# Altium PCB Lite Carrier for Mu.PcbDoc (part 10 of 15)
Units mm, origin at the board's own origin, x right, y up, seen from the top; angles counter-clockwise.
Board outline 146 x 102 mm, 20 copper layers (F.Cu, F.Mask, B.Cu, B.Mask, In1.Cu, F.SilkS, In2.Cu, B.SilkS, F.Adhes, B.Adhes, F.Paste, B.Paste, Dwgs.User, Cmts.User, Eco1.User, Eco2.User, Edge.Cuts, Margin, B.CrtYd, F.CrtYd); 254 components, 382 nets, 1258 pads, 1020 vias.
Unrouted connection lines stored in the file: 113.
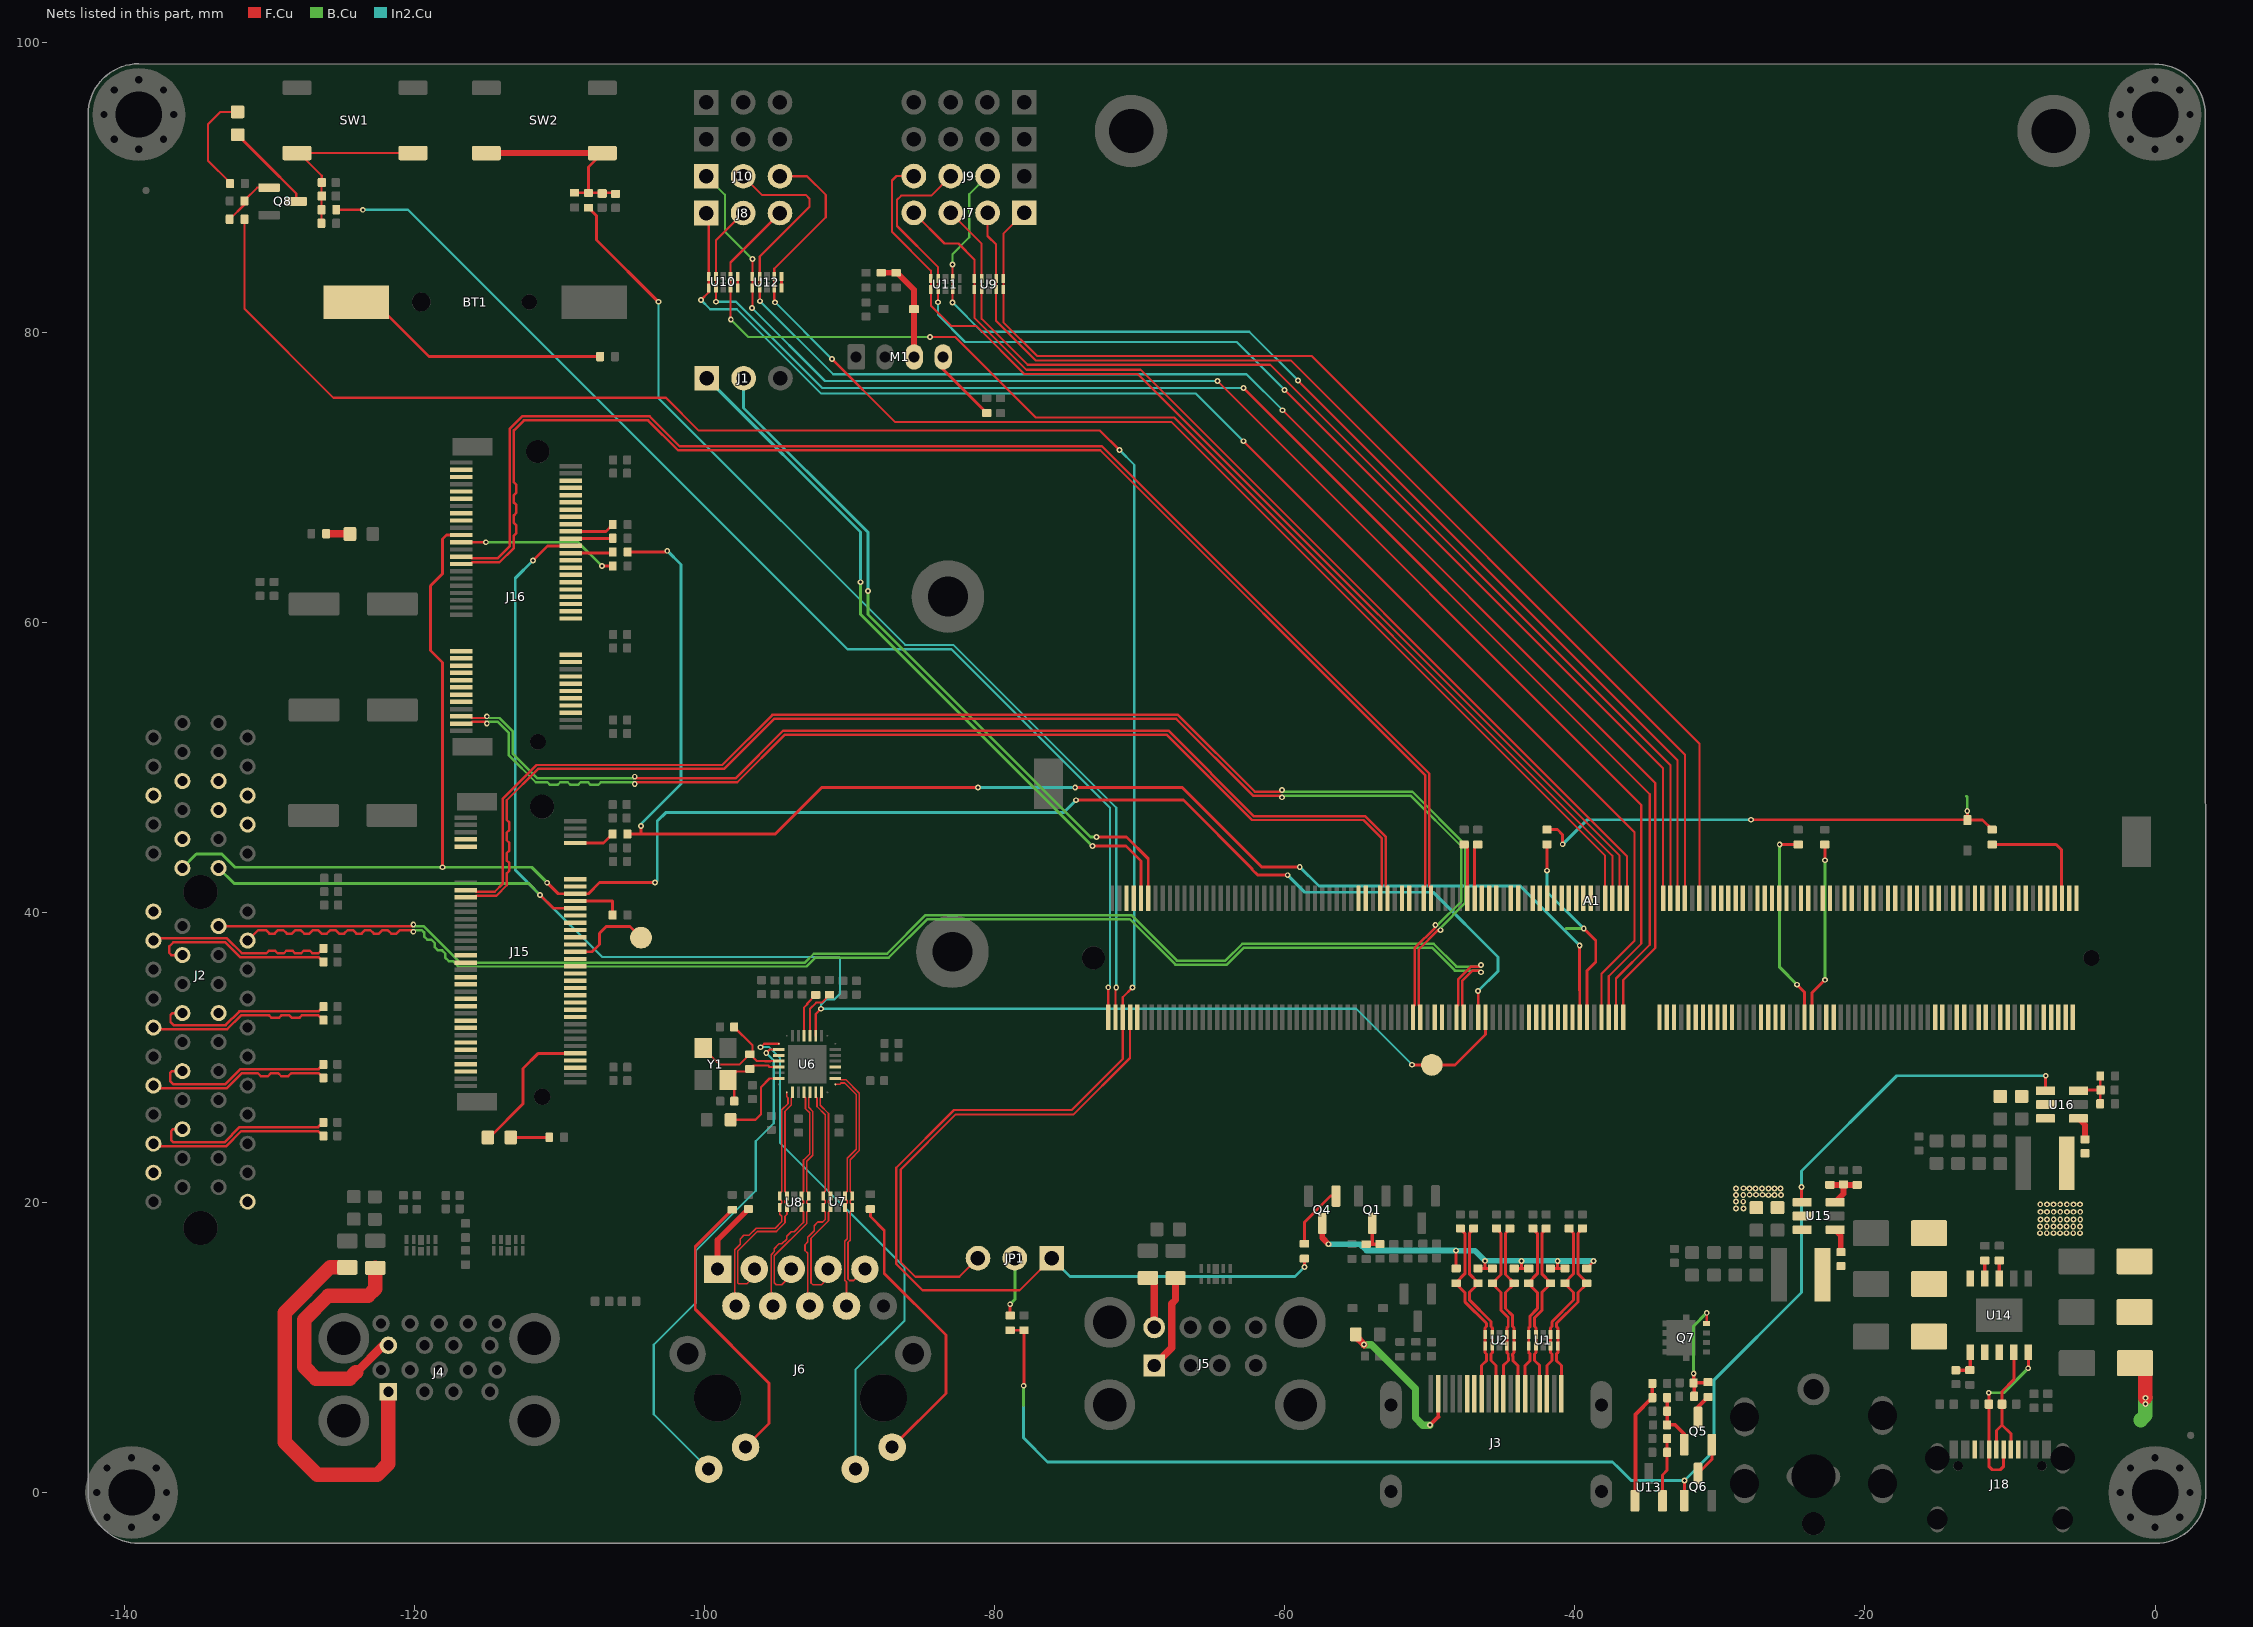
[diagram p20: the nets of this part, all layers, seen from the top]

## Via types
v1: diameter 0.4, hole 0.2, F.Cu to B.Cu, tented both sides, 952 vias
v2: diameter 0.5, hole 0.3, F.Cu to B.Cu, tented both sides, 68 vias

## Nets (pads, with @x,y where several pads share a name; then routed paths per layer and width w, separated by ;. In a path a pad name is that pad's centre, name@x,y a point inside that pad or via, vN(x,y) a via of type N, cw(c..) or ccw(c..) an arc to the next point about the centre after c; other vN are vias at no path point) (continued)
I2C2_SDA: A1.156 J7.1 U9.1 U9.10 | length 78.8
  F.Cu w0.15: J7.1@-77.95,88.22 -79.4,86.77 U9.10@-79.4,82.933 -79.4,80.684 -77.076,78.36 -58.16,78.36 -31.415,51.615 A1.156@-31.415,40.96
I2C3_SCL: A1.150 J9.2 U11.2 U11.9 | length 82.3
  F.Cu w0.15: v1(-82.9,82.04) U11.9@-82.9,82.933 U11.2@-82.9,83.708 v1(-82.9,84.67) ; v1(-59.08,76.66) -59.08,76.63 -32.915,50.465 A1.150@-32.915,40.96
  B.Cu w0.15: v1(-82.9,84.67) -82.9,85.38 -81.75,86.53 -81.75,89.5 J9.2@-80.49,90.76
  In2.Cu w0.15: v1(-82.9,82.04) -80.89,80.03 -62.45,80.03 v1(-59.08,76.66)
I2C3_SDA: A1.152 J7.2 U9.2 U9.9 | length 77.5
  F.Cu w0.15: J7.2@-80.49,88.22 -80.49,86.63 -79.9,86.04 U9.9@-79.9,82.933 -79.9,80.76 -77.19,78.05 -59.58,78.05 -32.415,50.885 A1.152@-32.415,40.96
I2C4_SCL: A1.146 J9.3 U11.4 U11.7 | length 85.4
  F.Cu w0.15: v1(-83.9,82.06) U11.7@-83.9,82.933 -83.9,84.48 -86.73,87.31 -86.73,89.12 -86.44,89.41 -84.38,89.41 J9.3@-83.03,90.76 ; v1(-60.01,76.01) -33.915,49.915 A1.146@-33.915,40.96
  In2.Cu w0.15: v1(-83.9,82.06) -83.9,81.18 -82.04,79.32 -63.32,79.32 v1(-60.01,76.01)
I2C4_SDA: A1.148 J7.3 U9.4 U9.7 | length 77.6
  F.Cu w0.15: J7.3@-83.03,88.22 -80.9,86.09 U9.7@-80.9,82.933 -80.9,80.92 -77.73,77.75 -61.01,77.75 -33.415,50.155 A1.148@-33.415,40.96
I2C5_SCL: A1.142 J9.4 U11.5 U11.6 | length 77.5
  F.Cu w0.15: J9.4@-85.57,90.76 -86.772,90.76 -87.08,90.452 -87.08,87.23 -87.08,86.92 -84.4,84.24 U11.5@-84.4,83.708 U11.6@-84.4,82.933 -84.4,81.83 -83,80.43 -81.27,80.43 -77.95,77.11 -70.135,77.11 -36.915,43.89 A1.142@-36.915,40.96
I2C5_SDA: A1.144 J7.4 U9.5 U9.6 | length 72.8
  F.Cu w0.15: J7.4@-85.57,88.22 -83.46,86.11 -82.5,86.11 -81.4,85.01 U9.6@-81.4,82.933 -81.4,80.996 -77.814,77.41 -69.94,77.41 -36.415,43.885 A1.144@-36.415,40.96
LED0_100: U6.27
LED1_1000: J6.L4 U6.26 | length 34.9
  F.Cu w0.15: v1(-95.75,30.3) -95.51,30.54 U6.26@-94.885,30.54
  In2.Cu w0.15: J6.L4@-99.715,1.61 -103.5,5.395 -103.5,10.19 -100.61,13.08 -100.61,16.67 -96.47,20.81 -96.47,24.218 -95.23,25.458 -95.23,29.78 v1(-95.75,30.3)
LED2_ACT: J6.L2 U6.25 | length 36.3
  F.Cu w0.15: v1(-96.134,30.694) -95.888,30.94 U6.25@-94.885,30.94
  In2.Cu w0.15: v1(-96.134,30.694) -96.103,30.725 -95.574,30.725 -94.79,29.941 -94.79,24.09 -86.22,15.52 -86.22,11.84 -89.605,8.455 J6.L2@-89.605,1.61
MDI0+: J6.R2 U6.1 U8.5 U8.6 | length 17.5
  F.Cu w0.116: J6.R2@-97.835,12.86 -97.928,12.953 -97.928,16.736 -97.537,17.127 -97.537,17.477 -97.289,17.726 -96.938,17.726 -96.445,18.219 -96.196,18.219 -95.135,18.219 -94.674,18.68 -94.674,19.044 -94.815,19.185 U8.6@-94.815,19.653 -94.815,19.841 -94.674,19.982 -94.674,20.1 -94.815,20.241 U8.5@-94.815,20.428 -94.815,20.616 -94.674,20.757 -94.674,26.38 -94.244,26.81 -94.244,27.199 -94.335,27.29 U6.1@-94.335,27.59
MDI0-: J6.R3 U6.2 U8.4 U8.7 | length 17.6
  F.Cu w0.116: J6.R3@-96.565,15.4 -96.565,14.905 -97.08,14.39 -97.65,14.39 -97.71,14.45 -97.71,16.646 -96.355,18.001 -95.045,18.001 -94.456,18.59 -94.456,19.044 -94.315,19.185 U8.7@-94.315,19.653 -94.315,19.841 -94.456,19.982 -94.456,20.1 -94.315,20.241 U8.4@-94.315,20.428 -94.315,20.616 -94.456,20.757 -94.456,26.29 -94.026,26.72 -94.026,27.199 -93.935,27.29 U6.2@-93.935,27.59
MDI1+: J6.R4 U6.4 U8.2 U8.9 | length 16.5
  F.Cu w0.116: J6.R4@-95.295,12.86 -95.408,12.973 -95.408,16.402 -95.192,16.618 -95.192,16.813 -94.865,17.14 -94.67,17.14 -94.343,17.467 -94.343,17.662 -94.017,17.989 -93.821,17.989 -93.288,18.522 -93.174,18.636 -93.174,19.325 -93.315,19.466 U8.9@-93.315,19.653 -93.315,19.841 -93.174,19.982 -93.174,20.1 -93.315,20.241 U8.2@-93.315,20.428 -93.315,20.616 -93.174,20.757 -93.174,22.92 -92.759,23.335 -92.759,26.175 -93.044,26.46 -93.044,27.199 -93.135,27.29 U6.4@-93.135,27.59
MDI1-: J6.R5 U6.5 U8.1 U8.10 | length 16.5
  F.Cu w0.116: J6.R5@-94.025,15.4 -94.025,14.975 -94.67,14.33 -95.06,14.33 -95.19,14.46 -95.19,16.312 -92.956,18.546 -92.956,19.325 -92.815,19.466 U8.10@-92.815,19.653 -92.815,19.841 -92.956,19.982 -92.956,20.1 -92.815,20.241 U8.1@-92.815,20.428 -92.815,20.616 -92.956,20.757 -92.956,22.83 -92.541,23.245 -92.541,26.265 -92.826,26.55 -92.826,27.199 -92.735,27.29 U6.5@-92.735,27.59
MDI2+: J6.R6 U6.6 U7.5 U7.6 | length 16
  F.Cu w0.116: J6.R6@-92.755,12.86 -92.878,12.983 -92.878,15.838 -92.878,16.489 -93.075,16.686 -93.075,17.089 -92.878,17.286 -92.878,17.616 -92.817,17.677 -92.445,18.049 -92.445,18.403 -92.197,18.65 -91.844,18.65 -91.674,18.82 -91.674,19.33 -91.815,19.471 U7.6@-91.815,19.658 ; U6.6@-92.335,27.59 -92.335,27.29 -92.244,27.199 -92.244,26.61 -91.674,26.04 -91.674,20.762 -91.815,20.621 U7.5@-91.815,20.433 -91.815,20.246 -91.674,20.105 -91.674,19.987 U7.6@-91.815,19.846
MDI2-: J6.R7 U6.7 U7.4 U7.7 | length 16
  F.Cu w0.116: U6.7@-91.935,27.59 -91.935,27.29 -92.026,27.199 -92.026,26.7 -91.456,26.13 -91.456,20.762 -91.315,20.621 U7.4@-91.315,20.433 -91.315,20.246 -91.456,20.105 -91.456,19.987 U7.7@-91.315,19.846 ; J6.R7@-91.485,15.4 -91.485,14.775 -91.94,14.32 -92.53,14.32 -92.66,14.45 -92.66,17.526 -91.456,18.73 -91.456,19.33 -91.315,19.471 U7.7@-91.315,19.658
MDI3+: J6.R8 U6.9 U7.2 U7.9 | length 17.2
  F.Cu w0.116: U6.9@-90.985,28.14 -90.685,28.14 -90.594,28.231 -90.335,28.231 -89.549,27.445 -89.549,23.665 -90.174,23.04 -90.174,20.762 -90.315,20.621 U7.2@-90.315,20.433 -90.315,20.246 -90.174,20.105 -90.174,19.987 -90.315,19.846 U7.9@-90.315,19.658 -90.315,19.471 -90.174,19.33 -90.174,17.49 -90.33,17.334 -90.33,14.636 -90.215,14.521 J6.R8@-90.215,12.86 J6.R8@-90.33,12.975
MDI3-: J6.R9 U6.10 U7.1 U7.10 | length 18.3
  F.Cu w0.116: U6.10@-90.985,28.54 -90.685,28.54 -90.594,28.449 -90.245,28.449 -89.331,27.535 -89.331,23.575 -89.956,22.95 -89.956,20.762 -89.815,20.621 U7.1@-89.815,20.433 -89.815,20.246 -89.956,20.105 -89.956,19.987 -89.815,19.846 U7.10@-89.815,19.658 -89.815,19.471 -89.956,19.33 -89.956,17.4 -90.112,17.244 -90.112,14.726 -90.006,14.62 -89.725,14.62 J6.R9@-88.945,15.4 ; J6.R9@-88.962,15.4 J6.R9@-88.945,15.4 ; J6.R9@-88.945,14.735 J6.R9@-88.945,15.4 ; J6.R9@-88.94,14.71 -88.94,15.395 J6.R9@-88.945,15.4
Net-(A1-SIO_UART_RX): A1.12 J1.2 | length 48.9
  F.Cu w0.2: v1(-72.97,45.2) -70.92,45.2 -69.415,43.695 A1.12@-69.415,40.96
  B.Cu w0.2: v1(-88.737,62.148) -88.737,60.542 -73.395,45.2 v1(-72.97,45.2)
  In2.Cu w0.2: J1.2@-97.31,76.82 -97.31,74.775 -88.737,66.202 v1(-88.737,62.148)
Net-(A1-SIO_UART_TX): A1.10 J1.1 | length 49.6
  F.Cu w0.2: v1(-73.26,44.57) -70.95,44.57 -69.915,43.535 A1.10@-69.915,40.96
  B.Cu w0.2: v1(-89.25,62.76) -89.25,60.544 -73.276,44.57 v1(-73.26,44.57)
  In2.Cu w0.2: J1.1@-99.85,76.82 -89.25,66.22 v1(-89.25,62.76)
Net-(A1-TCP0_HPD): A1.187 R76.1 | length 12.3
  F.Cu w0.2: A1.187@-23.665,32.76 -23.665,34.428 v1(-22.748,35.345) ; R76.1@-22.775,44.671 -22.748,44.644 v1(-22.748,43.587)
  B.Cu w0.2: v1(-22.748,35.345) v1(-22.748,43.587)
Net-(A1-TCP1_HPD): A1.185 R77.1 | length 13.9
  F.Cu w0.2: v1(-25.883,44.672) -25.875,44.68 R77.1@-24.604,44.68 ; v1(-24.683,35.011) -24.165,34.493 A1.185@-24.165,32.76
  B.Cu w0.2: v1(-25.883,44.672) v1(-25.883,44.672) -25.882,36.21 v1(-24.683,35.011)
Net-(A1-{\B\I\O\S\_\S\E\L\}\)\: A1.133 R2.1 TP7.1 | length 14.9
  F.Cu w0.2: v1@-41.99,42.82 -41.97,42.82 v1(-41.92,42.87) R2.1@-41.92,44.68 ; v1(-39.39,38.88) -38.56,38.05 -38.56,36.58 -39.165,35.975 A1.133@-39.165,32.76
  B.Cu w0.2: TP7.1@-40.6,38.88 v1(-39.39,38.88)
  In2.Cu w0.2: v1(-41.92,42.87) -41.92,41.41 v1(-39.39,38.88)
Net-(A1-{\C\L\K\R\E\Q\3\}\)\: A1.100 R79.1 | length 3.8
  F.Cu w0.2: R79.1@-47.635,44.68 -47.415,44.46 A1.100@-47.415,40.96
Net-(A1-{\C\L\K\R\E\Q\4\}\)\: A1.102 R78.1 | length 3.8
  F.Cu w0.2: A1.102@-46.915,40.96 -46.915,44.46 R78.1@-46.695,44.68
Net-(BT1-+): BT1.1 R1.2 | length 18.4
  F.Cu w0.2: BT1.1@-124.01,82.07 -122.75,82.07 -118.99,78.31 R1.2@-107.2,78.31
Net-(D9-A): D9.2 R30.1 | length 2.7
  F.Cu w0.2: D9.2@-113.363,24.48 -110.72,24.48 R30.1@-110.71,24.49
Net-(D9-K): D9.1 J15.10 | length 9.8
  F.Cu w0.2: D9.1@-114.937,24.48 -114.83,24.48 -112.51,26.8 -112.51,29.23 -111.46,30.28 J15.10@-108.985,30.28
Net-(D21-A2): C66.1 D21.2 R48.1 R50.1 SW1.1 | length 13.7
  F.Cu w0.15: R50.1@-126.42,87.5 -126.42,90.278 C66.1@-126.387,90.31 -126.387,90.787 -127.94,92.34 SW1.1@-128.1,92.34 SW1.1@-120.1,92.34
Net-(D22-A): D22.2 R52.1 | length 7.1
  F.Cu w0.15: R52.1@-132.71,90.24 -132.71,90.3 -134.23,91.82 -134.23,94.33 -133.382,95.178 D22.2@-132.19,95.177
Net-(D22-K): D22.1 Q8.3 | length 6.3
  F.Cu w0.15: -129.282,90.695 -128.145,89.557 Q8.3@-128.145,89.01
  F.Cu w0.2: D22.1@-132.19,93.603 -129.282,90.695
Net-(D23-A): D23.2 R54.2 | length 1.7
  F.Cu w0.5: R54.2@-126.09,66.1 -124.468,66.1 D23.2@-124.447,66.08
Net-(D25-A2): C69.1 D25.2 R55.1 R56.1 SW2.1 | length 14
  F.Cu w0.2: R56.1@-108.96,89.61 -106.21,89.61 C69.1@-106.13,89.53 ; R55.1@-108,89.59 -108,91.39 SW2.1@-107.05,92.34
  F.Cu w0.4: SW2.1@-115.05,92.34 SW2.1@-107.05,92.34
Net-(D26-A): D26.2 M1.3 R68.1 R72.2 | length 7.4
  F.Cu w0.4: R68.1@-87.82,84.09 R72.2@-86.79,84.09 -86.73,84.09 -85.56,82.92 D26.2@-85.56,81.59 -85.56,78.3 M1.3@-85.55,78.29
Net-(J3-+5V): F1.2 J3.18 | length 11.3
  F.Cu w0.254: -49.43,5.205 J3.18@-49.43,6.805
  F.Cu w0.3: v1(-49.985,4.65) -49.43,5.205
  F.Cu w0.508: F1.2@-55.11,10.9 -55.11,10.775 v1(-54.535,10.2)
  B.Cu w0.508: v1(-54.535,10.2) -54.035,10.2 -50.985,7.15 -50.985,5.15 -50.485,4.65 v1(-49.985,4.65)
Net-(J4A-VBUS1): F4.2 J4.1 | length 27.9
  F.Cu w1: F4.2@-124.63,15.518 -125.822,15.518 -128.94,12.4 -128.94,3.46 -126.71,1.23 -122.55,1.23 -121.8,1.98 J4.1@-121.8,6.95
Net-(J4B-VBUS2): F5.2 J4.10 | length 17.6
  F.Cu w0.4: J4.10@-122.15,10.15 J4.10@-121.8,10.15
  F.Cu w0.6: -124.02,8.28 J4.10@-122.15,10.15
  F.Cu w1: -124.02,8.28 -124.05,8.28 -124.47,7.86 -126.8,7.86 -127.6,8.66 -127.6,11.91 -125.96,13.55 -123.2,13.55 -122.7,14.05 F5.2@-122.7,15.508
Net-(J5-VBUS1): F2.2 J5.1 | length 6.7
  F.Cu w0.5: J5.1@-69,8.762 -67.79,9.972 -67.79,13.02 -67.53,13.28 F2.2@-67.53,14.895
Net-(J5-VBUS2): F3.2 J5.5 | length 3.5
  F.Cu w0.5: J5.5@-69,11.382 F3.2@-69,14.895
Net-(J6-CT): C48.1 J6.R1 | length 5
  F.Cu w0.4: J6.R1@-99.105,15.4 -99.105,17.415 C48.1@-96.97,19.55
Net-(J6-PadL1): J6.L1 R25.1 | length 20.1
  F.Cu w0.2: R25.1@-88.57,19.54 -88.57,19.02 -87.61,18.06 -87.61,15.1 -83.36,10.85 -83.36,6.835 J6.L1@-87.065,3.13
Net-(J6-PadL3): J6.L3 R24.1 | length 20.2
  F.Cu w0.2: R24.1@-98.09,19.5 -100.64,16.95 -100.64,12.63 -95.55,7.54 -95.55,4.755 J6.L3@-97.175,3.13
Net-(J15-DEVSLP): J15.38 TP2.1 | length 6.1
  F.Cu w0.2: J15.38@-108.985,37.28 -107.76,37.28 -107.25,37.79 -107.25,38.55 -106.78,39.02 -105.15,39.02 TP2.1@-104.38,38.25
Net-(J15-PEDET): J15.69
Net-(J15-SUSCLK): J15.68 R29.1 | length 2.9
  F.Cu w0.2: J15.68@-108.985,44.78 -106.96,44.78 R29.1@-106.34,45.4
Net-(J16-SUSCLK): J16.50 R33.1 | length 2.9
  F.Cu w0.2: J16.50@-109.22,64.76 -106.41,64.76 R33.1@-106.33,64.84
Net-(J16-{\W\_\D\I\S\A\B\L\E\1\}\)\: J16.56 R34.1 | length 3.1
  F.Cu w0.2: J16.56@-109.22,66.26 -106.8,66.26 R34.1@-106.33,66.73
Net-(J16-{\W\_\D\I\S\A\B\L\E\2\}\)\: J16.54 R35.2 | length 2.9
  F.Cu w0.2: J16.54@-109.22,65.76 -106.36,65.76 R35.2@-106.33,65.79
Net-(JP1-C): JP1.2 R46.1 | length 4.1
  F.Cu w0.2: R46.1@-78.93,12.21 v1(-78.93,12.98)
  B.Cu w0.2: v1(-78.93,12.98) -78.61,13.3 JP1.2@-78.61,16.16
Net-(M1-PWM): M1.4 R69.2 | length 5.1
  F.Cu w0.2: M1.4@-83.55,78.29 -83.55,77.42 R69.2@-80.55,74.42
Net-(Q1-D): Q1.3 R6.1 R11.1 | length 2.4
  F.Cu w0.25: R6.1@-54.39,17.117 -53.97,17.117 ; Q1.3@-53.97,18.57 -53.97,17.117 ; R11.1@-53.44,17.137 -53.46,17.117 -53.97,17.117
Net-(Q4-D): Q4.3 R7.2 R8.2 R9.2 R10.2 R13.2 R14.2 R16.2 R17.2 | length 26.9
  F.Cu w0.206: v1(-48.2,16.673) -48.185,16.658 R7.2@-48.185,15.45 ; R8.2@-46.685,15.45 -46.186,15.45 ; v1(-46.19,15.974) -46.186,15.97 -46.186,15.45 ; R9.2@-45.685,15.45 -46.186,15.45 ; R10.2@-44.185,15.45 -43.687,15.45 ; v1(-43.684,15.958) -43.687,15.955 -43.687,15.45 ; R13.2@-43.185,15.45 -43.687,15.45 ; R14.2@-41.685,15.45 -41.184,15.45 ; v1(-41.186,15.965) -41.184,15.963 -41.184,15.45 ; R16.2@-40.685,15.45 -41.184,15.45 ; R17.2@-39.185,15.45 -38.712,15.923 v1(-38.712,15.969)
  F.Cu w0.4: Q4.3@-57.418,18.562 -57.418,17.557 v1(-56.98,17.12)
  In2.Cu w0.2: -48.207,16.68 v1(-48.2,16.673) ; -41.195,15.974 v1(-41.186,15.965) ; -38.716,15.965 v1(-38.712,15.969)
  In2.Cu w0.4: v1(-56.98,17.12) -54.81,17.12 -54.37,16.68 -48.207,16.68 ; v1(-48.2,16.673) -46.889,16.673 v1(-46.19,15.974) -41.195,15.974 ; v1(-41.186,15.965) -38.716,15.965
Net-(Q4-G): Q4.1 R19.2 | length 4.4
  F.Cu w0.2: R19.2@-58.65,17.15 -58.65,18.637 -56.85,20.437 Q4.1@-56.467,20.437
Net-(Q5-D): Q5.3 R45.1 | length 1.7
  F.Cu w0.254: Q5.3@-31.51,5.177 -31.51,5.903 R45.1@-30.82,6.593
Net-(Q5-G): C62.1 Q5.1 R41.1 R42.2 | length 4.1
  F.Cu w0.254: R41.1@-33.64,6.542 -33.64,4.673 C62.1@-33.65,4.663 -33.083,4.663 -32.46,4.04 Q5.1@-32.46,3.303
Net-(Q5-S): Q5.2 Q6.3 | length 2.4
  F.Cu w0.2: Q6.3@-31.51,1.32 -30.56,2.27 Q5.2@-30.56,3.303
Net-(Q7-G): C63.1 Q7.4 R44.1 R45.2 | length 7.9
  F.Cu w0.2: Q7.4@-30.92,11.65 -30.91,11.66 v1(-30.91,12.39)
  F.Cu w0.254: v1(-31.811,8.2) v1(-31.811,8.2) C63.1@-31.81,7.562 ; R44.1@-31.78,6.632 -31.78,7.532 C63.1@-31.81,7.562 ; R45.2@-30.82,7.612 -30.87,7.562 C63.1@-31.81,7.562
  B.Cu w0.2: v1(-31.811,8.2) -31.811,11.489 v1(-30.91,12.39)
Net-(Q8-G): Q8.1 R47.2 R49.2 | length 3.8
  F.Cu w0.15: R47.2@-132.74,87.78 -131.72,88.8 R49.2@-131.72,89.04 -131.72,89.08 -130.84,89.96 Q8.1@-130.02,89.96
Net-(U6-CKXTAL1): C47.2 R23.2 U6.28 Y1.1 | length 8.6
  F.Cu w0.15: Y1.1@-100.085,30.64 -98.945,29.5 -97.6,29.5 -97.05,30.05 R23.2@-96.695,30.05 ; C47.2@-97.965,32.1 -96.695,30.83 R23.2@-96.695,30.05 ; U6.28@-94.885,29.74 -95.462,29.74 -95.465,29.736 -95.817,29.736 -95.821,29.74 -96.385,29.74 R23.2@-96.695,30.05
Net-(U6-CKXTAL2): C46.2 R23.1 U6.29 Y1.3 | length 5.8
  F.Cu w0.15: C46.2@-97.955,26.98 -97.955,28.01 Y1.3@-98.385,28.44 -97.795,29.03 -97.05,29.03 R23.1@-96.75,29.33 ; R23.1@-96.88,29.2 -96.644,29.436 -95.617,29.436 -95.52,29.34 U6.29@-94.885,29.34 U6.29@-94.895,29.33
Net-(U6-ISOLATEB): R20.2 U6.20 | length 3.6
  F.Cu w0.15: U6.20@-92.735,31.49 -92.735,33.349 -92.309,33.775 -91.93,33.775 R20.2@-91.385,34.32
Net-(U6-LANWAKEB): R21.2 U6.21 | length 3.2
  F.Cu w0.15: U6.21@-93.135,31.49 -93.135,33.448 -92.925,33.658 -92.925,33.72 R21.2@-92.335,34.31
Net-(U6-RSET): R22.2 U6.31 | length 5.6
  F.Cu w0.15: R22.2@-98.21,25.7 -96.495,25.7 -96.1,26.095 -96.1,27.96 -95.52,28.54 U6.31@-94.885,28.54
Net-(U10-NC-Pad6): U10.5 U10.6 | length 0.8
  F.Cu w0.2: U10.5@-97.71,83.055 U10.6@-97.71,83.83
Net-(U12-NC-Pad6): U12.5 U12.6 | length 0.8
  F.Cu w0.2: U12.5@-94.7,83.053 U12.6@-94.7,83.828
Net-(U13-K): R40.1 R41.2 U13.1 | length 8.6
  F.Cu w0.254: U13.1@-35.86,-0.565 -35.82,-0.525 -35.82,5.382 R41.2@-34.66,6.542 R40.1@-34.66,7.522
Net-(U13-REF): R38.1 R39.2 U13.2 | length 4.4
  F.Cu w0.2: U13.2@-33.96,-0.565 -33.96,1.21 -33.64,1.53 R38.1@-33.64,2.772 R39.2@-33.64,3.722
Net-(U14-CFG1): R43.1 U14.9 | length 1.2
  F.Cu w0.25: U14.9@-11.74,14.77 R43.1@-11.74,15.99
Net-(U14-VBUS): R36.2 U14.8 | length 1.2
  F.Cu w0.25: U14.8@-10.74,14.77 R36.2@-10.74,16
Net-(U14-VDD): C61.1 R37.2 U14.1 | length 2.2
  F.Cu w0.25: C61.1@-13.69,8.44 R37.2@-12.77,8.44 -12.75,8.46 -12.74,8.47 U14.1@-12.74,9.67
Net-(U15-BOOST): C70.2 U15.1 | length 1.5
  F.Cu w0.4: U15.1@-22.062,18.115 -21.67,17.722 C70.2@-21.67,16.76
Net-(U15-FB): C72.2 R57.1 R58.2 U15.3 | length 3.3
  F.Cu w0.4: R57.1@-22.42,21.21 R58.2@-20.54,21.21 ; U15.3@-22.062,20.015 -21.48,20.598 C72.2@-21.48,21.24
Net-(U15-SW): C70.1 L1.1 U15.6
Net-(U16-BOOST): C71.2 U16.1 | length 1.6
  F.Cu w0.4: U16.1@-5.282,25.797 -4.83,25.345 C71.2@-4.83,24.35
Net-(U16-FB): C73.2 R59.1 R60.2 U16.3 | length 3.4
  F.Cu w0.2: U16.3@-5.273,27.755 -3.755,27.755 C73.2@-3.75,27.75 ; R60.2@-3.79,26.8 -3.78,26.81 R59.1@-3.78,28.72
Net-(U16-SW): C71.1 L2.1 U16.6
PCIE30_TX0_N: C2.2 J2.B15 | length 12.7
  F.Cu w0.17: J2.B15@-136,37.05 -136.756,37.05 -136.908,37.202 -136.908,37.648 -136.626,37.93 -133.036,37.93 -132.015,36.909 -126.629,36.909 -126.3,36.58 C2.2@-126.27,36.58
PCIE30_TX0_P: C1.2 J2.B14 | length 12.8
  F.Cu w0.17: J2.B14@-138,38.05 -137.848,38.202 -132.924,38.202 -131.903,37.181 -131.171,37.181 -130.206,37.181 -130.037,37.35 -129.606,37.35 -129.437,37.181 -129.006,37.181 -128.837,37.35 -128.406,37.35 -128.237,37.181 -127.806,37.181 -127.637,37.35 -127.206,37.35 -127.037,37.181 -126.629,37.181 -126.3,37.51 C1.2@-126.27,37.51
PCIE30_TX1_N: C4.2 J2.B20 | length 12.6
  F.Cu w0.17: J2.B20@-138,32.05 -137.901,31.951 -132.907,31.951 -131.959,32.899 -130.022,32.899 -129.87,32.747 -129.322,32.747 -129.17,32.899 -128.622,32.899 -128.47,32.747 -127.922,32.747 -127.77,32.899 -126.629,32.899 -126.479,32.749 -126.3,32.57 C4.2@-126.27,32.57
PCIE30_TX1_P: C3.2 J2.B19 | length 12.5
  F.Cu w0.17: J2.B19@-136,33.043 J2.B19@-136,33.05 -136.69,33.05 -136.818,32.922 -136.818,32.44 -136.601,32.223 -133.019,32.223 -132.071,33.171 -126.629,33.171 -126.3,33.5 C3.2@-126.27,33.5
PCIE30_TX2_N: C6.2 J2.B24 | length 12.7
  F.Cu w0.17: J2.B24@-138,28.05 -137.836,27.886 -132.924,27.886 -131.892,28.917 -130.806,28.917 -130.584,28.696 -130.106,28.696 -129.884,28.917 -129.406,28.917 -129.184,28.696 -128.706,28.696 -128.484,28.917 -126.607,28.917 -126.55,28.86 C6.2@-126.28,28.59
PCIE30_TX2_P: C5.2 J2.B23 | length 12.7
  F.Cu w0.17: J2.B23@-135.997,29.05 J2.B23@-136,29.05 -136.724,29.05 -136.845,28.929 -136.845,28.36 -136.643,28.158 -133.036,28.158 -132.005,29.189 -126.607,29.189 C5.2@-126.28,29.517
PCIE30_TX3_N: C8.2 J2.B28 | length 12.5
  F.Cu w0.17: J2.B28@-138,24.05 -137.814,23.864 -132.995,23.864 -131.94,24.919 -126.639,24.919 -126.31,24.59 C8.2@-126.28,24.59
  B.Cu w0.201: J2.B28@-138,24.05 J2.B28@-137.875,23.925
PCIE30_TX3_P: C7.2 J2.B27 | length 12.6
  F.Cu w0.17: J2.B27@-135.997,25.05 J2.B27@-136,25.05 -136.636,25.05 -136.783,24.903 -136.783,24.305 -136.614,24.136 -133.107,24.136 -132.052,25.191 -126.639,25.191 -126.31,25.52 C7.2@-126.28,25.52
PWR_C_D+: D11.2 J18.A6 J18.B6 U14.4 | length 9.2
  F.Cu w0.2: J18.A6@-10.94,2.955 -10.94,4.28 -10.8,4.42 -10.555,4.665 ; J18.B6@-9.94,2.955 -9.94,4.05 -10.555,4.665 ; U14.4@-9.74,9.67 -9.74,7.77 -10.555,6.955 D11.2@-10.555,6.09 -10.555,4.665
PWR_C_D-: D10.2 J18.A7 J18.B7 U14.5 | length 12
  F.Cu w0.2: v1(-11.47,6.88) -11.455,6.865 D10.2@-11.455,6.09 -11.44,6.075 J18.B7@-11.44,2.955 -11.44,1.78 -11.23,1.57 -10.68,1.57 -10.44,1.81 J18.A7@-10.44,2.955 ; v1(-8.75,8.57) -8.74,8.58 U14.5@-8.74,9.67
  B.Cu w0.2: v1(-11.47,6.88) -10.44,6.88 v1(-8.75,8.57)
PWR_EN: Q6.1 R46.2 R51.2 TP9.1 U15.4 U16.4 | length 104.2
  F.Cu w0.2: R46.2@-78.93,11.19 R51.2@-77.98,11.19 -77.98,7.38 v1(-78,7.36) ; Q6.1@-32.46,-0.555 -32.45,-0.545 v1(-32.45,0.83) ; v1(-24.38,21.06) -24.38,20.057 U15.4@-24.338,20.015 ; U16.4@-7.548,27.755 -7.548,28.723 v1(-7.54,28.73)
  B.Cu w0.2: TP9.1@-78,6 v1(-78,7.36)
  In2.Cu w0.2: v1(-78,7.36) -78,3.75 -76.36,2.11 -53.99,2.11 -37.4,2.11 -36.96,1.67 -36.12,0.83 v1(-32.45,0.83) -30.42,2.86 -30.42,7.74 -24.38,13.78 v1(-24.38,21.06) -24.38,22.16 -17.81,28.73 v1(-7.54,28.73)
REFCLK0+: A1.85 J15.53 | length 94.6
  F.Cu w0.17: J15.53@-116.47,41.03 -115.845,41.03 -115.731,41.144 -114.353,41.144 -113.634,41.863 -113.634,42.689 -113.453,42.87 -113.453,43.389 -113.634,43.57 -113.634,44.089 -113.453,44.27 -113.453,44.789 -113.634,44.97 -113.634,45.489 -113.453,45.67 -113.453,46.189 -113.634,46.37 -113.634,46.915 -113.634,47.724 -111.474,49.884 -98.666,49.884 -95.212,53.338 -67.48,53.338 -62.186,48.044 -60.305,48.044 v1(-60.19,47.929) ; A1.85@-51.165,32.76 -51.165,33.485 -51.051,33.599 -51.051,37.531 -49.622,38.96 v1(-49.622,39.122)
  B.Cu w0.17: v1(-60.19,47.929) -60.075,48.044 -51.326,48.044 -47.836,44.554 -47.836,40.746 -49.46,39.122 v1(-49.622,39.122)
REFCLK0-: A1.87 J15.55 | length 94.6
  F.Cu w0.17: J15.55@-116.47,41.53 -115.845,41.53 -115.731,41.416 -114.465,41.416 -113.906,41.975 -113.906,47.836 -111.586,50.156 -98.779,50.156 -95.325,53.61 -67.368,53.61 -62.074,48.316 -60.305,48.316 v1(-60.19,48.431) ; A1.87@-50.665,32.76 -50.665,33.485 -50.779,33.599 -50.779,37.419 -49.43,38.768 v1(-49.268,38.768)
  B.Cu w0.17: v1(-60.19,48.431) -60.075,48.316 -51.214,48.316 -47.564,44.666 -47.564,40.634 -49.268,38.93 v1(-49.268,38.768)
REFCLK2+: A1.97 J2.A13 | length 96.6
  F.Cu w0.17: J2.A13@-133.5,39.05 -120.195,39.05 v1(-120.08,39.165) ; A1.97@-48.165,32.76 -48.165,33.485 -48.051,33.599 -48.051,35.371 -47.166,36.256 -46.595,36.256 v1(-46.48,36.371)
  B.Cu w0.17: v1(-120.08,39.165) -119.965,39.05 -119.388,39.05 -116.874,36.536 -93.086,36.536 -92.476,37.146 -87.416,37.146 -84.756,39.806 -70.574,39.806 -67.434,36.666 -64.096,36.666 -62.926,37.836 -49.744,37.836 -48.164,36.256 -46.595,36.256 v1(-46.48,36.371)
REFCLK2-: A1.99 J2.A14 | length 96.6
  F.Cu w0.17: J2.A14@-131.5,38.05 -130.772,38.778 -130.247,38.778 -129.997,38.528 -129.647,38.528 -129.397,38.778 -129.047,38.778 -128.797,38.528 -128.447,38.528 -128.197,38.778 -127.847,38.778 -127.597,38.528 -127.247,38.528 -126.997,38.778 -126.647,38.778 -126.397,38.528 -126.047,38.528 -125.797,38.778 -125.447,38.778 -125.197,38.528 -124.847,38.528 -124.597,38.778 -124.247,38.778 -123.997,38.528 -123.647,38.528 -123.397,38.778 -123.047,38.778 -122.797,38.528 -122.447,38.528 -122.197,38.778 -121.847,38.778 -121.597,38.528 -121.247,38.528 -120.997,38.778 -120.195,38.778 v1(-120.08,38.663) ; A1.99@-47.665,32.76 -47.665,33.485 -47.779,33.599 -47.779,35.259 -47.054,35.984 -46.595,35.984 v1(-46.48,35.869)
  B.Cu w0.17: v1(-120.08,38.663) -119.965,38.778 -119.5,38.778 -119.335,38.613 -119.335,38.333 -119.108,38.105 -118.827,38.105 -118.6,37.877 -118.6,37.597 -118.372,37.37 -118.092,37.37 -117.864,37.142 -117.864,36.862 -117.637,36.634 -117.357,36.634 -117.015,36.292 -116.986,36.264 -92.974,36.264 -92.364,36.874 -87.304,36.874 -84.644,39.534 -70.686,39.534 -67.546,36.394 -63.984,36.394 -62.814,37.564 -49.856,37.564 -48.276,35.984 -46.595,35.984 v1(-46.48,35.869)
REFCLK3+: A1.88 J16.47 | length 94.4
  F.Cu w0.17: J16.47@-116.77,64.01 -116.145,64.01 -116.031,64.124 -114.156,64.124 -113.15,65.13 -113.15,65.97 -112.969,66.151 -112.969,66.67 -113.15,66.851 -113.15,67.37 -112.969,67.551 -112.969,68.07 -113.15,68.251 -113.15,68.77 -112.969,68.951 -112.969,69.47 -113.15,69.651 -113.15,71.198 -113.15,73.23 -112.461,73.919 -103.889,73.919 -101.828,71.858 -72.719,71.858 -50.301,49.44 -50.301,41.799 -50.415,41.685 A1.88@-50.415,40.96
REFCLK3-: A1.90 J16.49 | length 94.4
  F.Cu w0.17: J16.49@-116.77,64.51 -116.145,64.51 -116.031,64.396 -114.268,64.396 -113.422,65.242 -113.422,73.342 -112.573,74.191 -103.777,74.191 -101.716,72.13 -72.607,72.13 -50.029,49.552 -50.029,41.799 -49.915,41.685 A1.90@-49.915,40.96
SLS_S3: A1.7 JP1.3 | length 34.5
  F.Cu w0.15: JP1.3@-81.15,16.16 -82.44,14.87 -85.465,14.87 -86.48,15.885 -86.48,22.266 -82.676,26.07 -74.556,26.07 -70.665,29.961 A1.7@-70.665,32.76
SOC_UART0_RX: A1.137 J8.1 U10.1 U10.10 | length 99.5
  F.Cu w0.15: v1(-100.24,82.21) -99.71,82.74 U10.1@-99.71,83.055 -99.71,88.04 J8.1@-99.88,88.21 ; v1(-62.84,72.48) -35.89,45.53 -35.89,38.04 -38.165,35.765 A1.137@-38.165,32.76
  In2.Cu w0.15: v1(-100.24,82.21) -99.61,81.58 -97.78,81.58 -91.96,75.76 -91.55,75.76 -66.12,75.76 v1(-62.84,72.48)
SOC_UART0_TX: A1.139 J10.1 U12.1 U12.10 | length 101.5
  F.Cu w0.15: v1(-96.72,81.67) -96.7,81.69 U12.1@-96.7,83.053 -96.7,84.81 v1(-96.7,85.03) ; v1(-64.63,76.63) -64.63,76.61 -35.42,47.4 -35.42,37.84 -37.665,35.595 A1.139@-37.665,32.76
  B.Cu w0.15: J10.1@-99.88,90.75 -98.6,89.47 -98.6,86.93 v1(-96.7,85.03)
  In2.Cu w0.15: v1(-96.72,81.67) -96.72,81.65 -91.7,76.63 v1(-64.63,76.63)
SOC_UART1_RX: A1.141 J8.2 U10.2 U10.9 | length 101.7
  F.Cu w0.15: v1(-99.21,82.09) U10.2@-99.21,83.055 -99.21,86.34 J8.2@-97.34,88.21 ; v1(-62.85,76.15) -34.84,48.14 -34.84,37.76 -37.165,35.435 A1.141@-37.165,32.76
  In2.Cu w0.15: v1(-99.21,82.09) -97.83,82.09 -91.89,76.15 v1(-62.85,76.15)
SOC_UART1_TX: A1.143 J10.2 U12.2 U12.9 | length 106.3
  F.Cu w0.15: J10.2@-97.34,90.75 -96.05,89.46 -93.02,89.46 -92.76,89.2 -92.76,88.65 -96.2,85.21 U12.2@-96.2,83.053 -96.2,82.156 v1(-96.177,82.133) ; v1(-60.15,74.61) -34.46,48.92 -34.46,37.54 -36.665,35.335 A1.143@-36.665,32.76
  In2.Cu w0.15: v1(-96.177,82.133) -96.173,82.133 -91.135,77.095 -62.635,77.095 v1(-60.15,74.61)
SOC_UART2_RX: A1.140 J8.3 U10.4 U10.7 | length 87.8
  F.Cu w0.15: v1(-98.19,80.87) -98.21,80.89 -98.21,82.25 U10.4@-98.21,83.055 -98.21,84.8 J8.3@-94.8,88.21 ; v1(-84.46,79.66) -82.71,79.66 -77.16,74.11 -67.63,74.11 -37.415,43.895 A1.140@-37.415,40.96
  B.Cu w0.15: v1(-98.19,80.87) -96.98,79.66 v1(-84.46,79.66)
SOC_UART2_TX: A1.138 J10.3 U12.4 U12.7 | length 88.6
  F.Cu w0.15: v1(-95.136,82.052) -95.2,82.115 U12.4@-95.2,83.053 -95.2,84.365 -91.65,87.915 -91.65,89.46 -92.94,90.75 J10.3@-94.8,90.75 ; v1(-91.22,78.15) -86.88,73.81 -67.825,73.81 -37.915,43.9 A1.138@-37.915,40.96
  In2.Cu w0.15: v1(-95.136,82.052) -91.235,78.15 v1(-91.22,78.15)
SUSCLK_WIFI: A1.131 R29.2 R33.2 | length 100.3
  F.Cu w0.2: R29.2@-105.32,45.4 -104.38,45.4 ; R33.2@-105.31,64.84 -102.65,64.84 v1(-102.57,64.92) ; v1(-104.38,45.96) -104.38,45.4 ; v1(-81.15,48.61) -91.92,48.61 -95.13,45.4 -104.38,45.4 ; v1(-74.45,48.61) -67.07,48.61 -61.59,43.13 v1(-58.97,43.13) ; v1(-39.67,37.72) -39.67,34.6 -39.665,34.595 A1.131@-39.665,32.76
  In2.Cu w0.2: v1(-104.38,45.96) -104.38,46.09 -101.63,48.84 -101.63,63.98 v1(-102.57,64.92) ; v1(-81.15,48.61) v1(-74.45,48.61) ; v1(-58.97,43.13) -57.65,41.81 -43.76,41.81 v1(-39.67,37.72)
TMDS_CK+: C23.2 J3.10 R8.1 U2.4 U2.7 | length 12.9
  F.Cu w0.206: C23.2@-46.974,18.21 -46.974,18.18 -47.28,17.874 -47.28,17.662 -47.281,17.661 -47.281,15.076 -46.685,14.48 R8.1@-46.685,14.43 -46.685,14.38 -47.281,13.784 -47.281,13.286 -45.786,11.791 -45.786,11.45 -45.69,11.354 U2.4@-45.69,10.885 U2.7@-45.69,10.11 -45.69,9.641 -45.786,9.545 -45.786,9.321 -45.776,9.311 -45.776,9.101 -45.43,8.755 J3.10@-45.43,6.805 ; R8.1@-46.7,14.38 R8.1@-46.7,14.43
TMDS_CK-: C24.2 J3.12 R7.1 U2.5 U2.6 | length 12.9
  F.Cu w0.206: R7.1@-48.1,14.38 R7.1@-48.1,14.43 ; C24.2@-47.894,18.21 -47.894,18.18 -47.588,17.874 -47.588,17.779 -47.589,17.778 -47.589,15.076 -48.185,14.48 R7.1@-48.185,14.43 -48.185,14.38 -47.589,13.784 -47.589,13.158 -46.094,11.663 -46.094,11.45 -46.19,11.354 U2.5@-46.19,10.885 U2.6@-46.19,10.11 -46.19,9.641 -46.094,9.545 -46.094,9.203 -46.084,9.193 -46.084,9.101 -46.43,8.755 J3.12@-46.43,6.805
TMDS_D0+: C21.2 J3.7 R10.1 U2.1 U2.10 | length 12.5
  F.Cu w0.206: C21.2@-44.482,18.21 -44.482,18.18 -44.788,17.874 -44.788,17.614 -44.781,17.607 -44.781,15.026 R10.1@-44.185,14.43 -44.185,14.38 -44.781,13.784 -44.781,12.691 -44.286,12.196 -44.286,11.45 -44.19,11.354 U2.1@-44.19,10.885 U2.10@-44.19,10.11 -44.19,9.641 -44.286,9.545 -44.286,9.406 -44.276,9.396 -44.276,9.101 -43.93,8.755 J3.7@-43.93,6.805
TMDS_D0-: C22.2 J3.9 R9.1 U2.2 U2.9 | length 12.5
  F.Cu w0.206: C22.2@-45.402,18.21 -45.402,18.18 -45.096,17.874 -45.096,17.496 -45.089,17.489 -45.089,15.026 R9.1@-45.685,14.43 -45.685,14.38 -45.089,13.784 -45.089,12.563 -44.594,12.068 -44.594,11.45 -44.69,11.354 U2.2@-44.69,10.885 U2.9@-44.69,10.11 -44.69,9.641 -44.594,9.545 -44.594,9.288 -44.584,9.278 -44.584,9.101 -44.93,8.755 J3.9@-44.93,6.805
TMDS_D1+: C19.2 J3.4 R14.1 U1.4 U1.7 | length 12.5
  F.Cu w0.206: J3.4@-42.43,6.805 -42.43,8.755 -42.776,9.101 -42.776,9.545 -42.68,9.641 U1.7@-42.68,10.11 U1.4@-42.68,10.885 -42.68,11.354 -42.776,11.45 -42.776,12.05 -42.281,12.545 -42.281,13.784 -41.685,14.38 R14.1@-41.685,14.43 -41.685,14.48 -42.281,15.076 -42.281,17.874 -41.975,18.18 C19.2@-41.975,18.21
TMDS_D1-: C20.2 J3.6 R13.1 U1.5 U1.6 | length 12.5
  F.Cu w0.206: J3.6@-43.43,6.805 -43.43,8.755 -43.084,9.101 -43.084,9.545 -43.18,9.641 U1.6@-43.18,10.11 U1.5@-43.18,10.885 -43.18,11.354 -43.084,11.45 -43.084,12.178 -42.589,12.673 -42.589,13.784 -43.185,14.38 R13.1@-43.185,14.43 -43.185,14.48 -42.589,15.076 -42.589,17.874 -42.895,18.18 C20.2@-42.895,18.21
TMDS_D2+: C17.2 J3.1 R17.1 U1.1 U1.10 | length 12.9
  F.Cu w0.206: J3.1@-40.93,6.805 -40.93,8.755 -41.276,9.101 -41.276,9.545 -41.18,9.641 U1.10@-41.18,10.11 U1.1@-41.18,10.885 -41.18,11.354 -41.276,11.45 -41.276,11.644 -39.781,13.139 -39.781,13.784 -39.185,14.38 R17.1@-39.185,14.43 -39.185,14.48 -39.781,15.076 -39.781,17.874 -39.475,18.18 C17.2@-39.475,18.21
TMDS_D2-: C18.2 J3.3 R16.1 U1.2 U1.9 | length 12.9
  F.Cu w0.206: J3.3@-41.93,6.805 -41.93,8.755 -41.584,9.101 -41.584,9.545 -41.68,9.641 U1.9@-41.68,10.11 U1.2@-41.68,10.885 -41.68,11.354 -41.584,11.45 -41.584,11.771 -40.089,13.266 -40.089,13.784 -40.685,14.38 R16.1@-40.685,14.43 -40.685,14.48 -40.089,15.076 -40.089,17.874 -40.395,18.18 C18.2@-40.395,18.21
unconnected-(A1-CSI_C_CK+-Pad202): A1.202
unconnected-(A1-CSI_C_CK--Pad204): A1.204
unconnected-(A1-CSI_C_D0+-Pad214): A1.214
unconnected-(A1-CSI_C_D0--Pad216): A1.216
unconnected-(A1-CSI_C_D1+-Pad208): A1.208
unconnected-(A1-CSI_C_D1--Pad210): A1.210
unconnected-(A1-CSI_D_CK+-Pad184): A1.184
unconnected-(A1-CSI_D_CK--Pad186): A1.186
unconnected-(A1-CSI_D_D0+{slash}CSI_C_D3+-Pad196): A1.196
unconnected-(A1-CSI_D_D0-{slash}CSI_C_D3--Pad198): A1.198
unconnected-(A1-CSI_D_D1+{slash}CSI_C_D2+-Pad190): A1.190
unconnected-(A1-CSI_D_D1-{slash}CSI_C_D2--Pad192): A1.192
unconnected-(A1-DDIB_AUX+-Pad193): A1.193
unconnected-(A1-DDIB_AUX--Pad191): A1.191
unconnected-(A1-FAN2_PWM-Pad6): A1.6
unconnected-(A1-FAN2_TAC-Pad8): A1.8
unconnected-(A1-GPP_A12-Pad121): A1.121
unconnected-(A1-GPP_B11-Pad125): A1.125
unconnected-(A1-GPP_B14-Pad123): A1.123
unconnected-(A1-GPP_D0-Pad128): A1.128
unconnected-(A1-GPP_D1-Pad130): A1.130
unconnected-(A1-GPP_D2-Pad132): A1.132
unconnected-(A1-GPP_D3-Pad134): A1.134
unconnected-(A1-GPP_E0-Pad119): A1.119
unconnected-(A1-GPP_F12-Pad126): A1.126
unconnected-(A1-GPP_F13-Pad124): A1.124
unconnected-(A1-GPP_F14-Pad122): A1.122
unconnected-(A1-GPP_F15-Pad120): A1.120
unconnected-(A1-GPP_F16-Pad118): A1.118
unconnected-(A1-HDA_BCLK-Pad174): A1.174
unconnected-(A1-HDA_RST-Pad172): A1.172
unconnected-(A1-HDA_SDIN-Pad180): A1.180
unconnected-(A1-HDA_SDOUT-Pad178): A1.178
unconnected-(A1-HDA_SYNC-Pad176): A1.176
unconnected-(A1-I2S_MCLK-Pad160): A1.160
unconnected-(A1-I2S_RXD-Pad168): A1.168
unconnected-(A1-I2S_SCLK-Pad162): A1.162
unconnected-(A1-I2S_SFRM-Pad164): A1.164
unconnected-(A1-I2S_TXD-Pad166): A1.166
unconnected-(A1-REFCLK1+-Pad91): A1.91
unconnected-(A1-REFCLK1--Pad93): A1.93
unconnected-(A1-SMB_CLK-Pad106): A1.106
unconnected-(A1-SMB_DATA-Pad108): A1.108
unconnected-(A1-SML1_CLK-Pad147): A1.147
unconnected-(A1-SML1_DATA-Pad145): A1.145
unconnected-(A1-SPI_CLK-Pad155): A1.155
unconnected-(A1-SPI_IO2-Pad161): A1.161
unconnected-(A1-SPI_IO3-Pad153): A1.153
unconnected-(A1-SPI_MISO{slash}SPI_IO1-Pad163): A1.163
unconnected-(A1-SPI_MOSI{slash}SPI_IO0-Pad159): A1.159
unconnected-(A1-TCP0_AUX+-Pad223): A1.223
unconnected-(A1-TCP0_AUX--Pad221): A1.221
unconnected-(A1-TCP0_DDC_SCL-Pad179): A1.179
unconnected-(A1-TCP0_DDC_SDA-Pad177): A1.177
unconnected-(A1-TCP0_TX0+-Pad247): A1.247
unconnected-(A1-TCP0_TX0--Pad245): A1.245
unconnected-(A1-TCP0_TX1+-Pad235): A1.235
unconnected-(A1-TCP0_TX1--Pad233): A1.233
unconnected-(A1-TCP0_TXRX0+-Pad241): A1.241
unconnected-(A1-TCP0_TXRX0--Pad239): A1.239
unconnected-(A1-TCP0_TXRX1+-Pad229): A1.229
unconnected-(A1-TCP0_TXRX1--Pad227): A1.227
unconnected-(A1-TCP1_AUX+-Pad244): A1.244
unconnected-(A1-TCP1_AUX--Pad246): A1.246
unconnected-(A1-TCP1_DDC_SCL-Pad175): A1.175
unconnected-(A1-TCP1_DDC_SDA-Pad173): A1.173
unconnected-(A1-TCP1_TX0+-Pad220): A1.220
unconnected-(A1-TCP1_TX0--Pad222): A1.222
unconnected-(A1-TCP1_TX1+-Pad232): A1.232
unconnected-(A1-TCP1_TX1--Pad234): A1.234
unconnected-(A1-TCP1_TXRX0+-Pad226): A1.226
unconnected-(A1-TCP1_TXRX0--Pad228): A1.228
unconnected-(A1-TCP1_TXRX1+-Pad238): A1.238
unconnected-(A1-TCP1_TXRX1--Pad240): A1.240
unconnected-(A1-TPM_IRQ-Pad127): A1.127
unconnected-(A1-TSENSE-Pad9): A1.9
unconnected-(A1-USB2_P4+-Pad70): A1.70
unconnected-(A1-USB2_P4--Pad72): A1.72
unconnected-(A1-USB2_P6+-Pad112): A1.112
unconnected-(A1-USB2_P6--Pad114): A1.114
unconnected-(A1-USB2_P8+-Pad82): A1.82
unconnected-(A1-USB2_P8--Pad84): A1.84
unconnected-(A1-{\P\R\O\C\H\O\T\}\-\P\a\d\1\1\7\)\: A1.117
unconnected-(A1-{\S\M\B\_\A\L\E\R\T\}\-\P\a\d\1\0\4\)\: A1.104
unconnected-(A1-{\S\M\L\1\_\A\L\E\R\T\}\-\P\a\d\1\4\9\)\: A1.149
unconnected-(A1-{\S\P\I\_\C\S\2\}\-\P\a\d\1\5\7\)\: A1.157
unconnected-(A1-{\S\P\I\_\C\S\}\-\P\a\d\1\6\5\)\: A1.165
unconnected-(A1-{\U\S\B\_\O\C\}\-\P\a\d\1\2\9\)\: A1.129
unconnected-(J2-JTAG1-PadB9): J2.B9
unconnected-(J2-JTAG2-PadA5): J2.A5
unconnected-(J2-JTAG3-PadA6): J2.A6
unconnected-(J2-JTAG4-PadA7): J2.A7
unconnected-(J2-JTAG5-PadA8): J2.A8
unconnected-(J2-RSVD-PadA19): J2.A19
unconnected-(J2-RSVD-PadA32): J2.A32
unconnected-(J2-RSVD-PadB12): J2.B12
unconnected-(J2-RSVD-PadB30): J2.B30
unconnected-(J2-SMCLK-PadB5): J2.B5
unconnected-(J2-SMDAT-PadB6): J2.B6
unconnected-(J3-CEC-Pad13): J3.13
unconnected-(J3-UTILITY-Pad14): J3.14
unconnected-(J15-NC-Pad6): J15.6
unconnected-(J15-NC-Pad8): J15.8
unconnected-(J15-NC-Pad20): J15.20
unconnected-(J15-NC-Pad22): J15.22
unconnected-(J15-NC-Pad24): J15.24
unconnected-(J15-NC-Pad26): J15.26
unconnected-(J15-NC-Pad28): J15.28
unconnected-(J15-NC-Pad30): J15.30
unconnected-(J15-NC-Pad32): J15.32
unconnected-(J15-NC-Pad34): J15.34
unconnected-(J15-NC-Pad36): J15.36
unconnected-(J15-NC-Pad40): J15.40
unconnected-(J15-NC-Pad42): J15.42
unconnected-(J15-NC-Pad44): J15.44
unconnected-(J15-NC-Pad46): J15.46
unconnected-(J15-NC-Pad48): J15.48
unconnected-(J15-NC-Pad56): J15.56
unconnected-(J15-NC-Pad58): J15.58
unconnected-(J15-NC-Pad67): J15.67
unconnected-(J15-PERn1-Pad29): J15.29
unconnected-(J15-PERn2-Pad17): J15.17
unconnected-(J15-PERn3-Pad5): J15.5
unconnected-(J15-PERp1-Pad31): J15.31
unconnected-(J15-PERp2-Pad19): J15.19
unconnected-(J15-PERp3-Pad7): J15.7
unconnected-(J15-PETn1-Pad35): J15.35
unconnected-(J15-PETn2-Pad23): J15.23
unconnected-(J15-PETn3-Pad11): J15.11
unconnected-(J15-PETp1-Pad37): J15.37
unconnected-(J15-PETp2-Pad25): J15.25
unconnected-(J15-PETp3-Pad13): J15.13
unconnected-(J16-COEX1-Pad48): J16.48
unconnected-(J16-COEX2-Pad46): J16.46
unconnected-(J16-COEX3-Pad44): J16.44
unconnected-(J16-I2C_CLK-Pad60): J16.60
unconnected-(J16-I2C_DATA-Pad58): J16.58
unconnected-(J16-PCM_CLK{slash}I2S_SCK-Pad8): J16.8
unconnected-(J16-PCM_IN{slash}I2S_SD_IN-Pad12): J16.12
unconnected-(J16-PCM_OUT{slash}I2S_SD_OUT-Pad14): J16.14
unconnected-(J16-PCM_SYNC{slash}I2S_WS-Pad10): J16.10
unconnected-(J16-RESERVED-Pad64): J16.64
unconnected-(J16-RESERVED{slash}PERn1-Pad67): J16.67
unconnected-(J16-RESERVED{slash}PERp1-Pad65): J16.65
unconnected-(J16-RESERVED{slash}PETn1-Pad61): J16.61
unconnected-(J16-RESERVED{slash}PETp1-Pad59): J16.59
unconnected-(J16-RESERVED{slash}REFCLKn1-Pad73): J16.73
unconnected-(J16-RESERVED{slash}REFCLKp1-Pad71): J16.71
unconnected-(J16-SDIO_CLK-Pad9): J16.9
unconnected-(J16-SDIO_CMD-Pad11): J16.11
unconnected-(J16-SDIO_DATA0-Pad13): J16.13
unconnected-(J16-SDIO_DATA1-Pad15): J16.15
unconnected-(J16-SDIO_DATA2-Pad17): J16.17
unconnected-(J16-SDIO_DATA3-Pad19): J16.19
unconnected-(J16-UART_CTS-Pad34): J16.34
unconnected-(J16-UART_RTS-Pad36): J16.36
unconnected-(J16-UART_RXD-Pad22): J16.22
unconnected-(J16-UART_TXD-Pad32): J16.32
unconnected-(J16-UIM_POWER_SNK{slash}{\C\L\K\R\E\Q\1\}\-\P\a\d\6\8\)\: J16.68
unconnected-(J16-UIM_POWER_SRC{slash}GPIO1{slash}{\P\E\W\A\K\E\1\}\-\P\a\d\7\0\)\: J16.70
unconnected-(J16-UIM_SWP{slash}{\P\E\R\S\T\1\}\-\P\a\d\6\6\)\: J16.66
unconnected-(J16-VENDOR_DEFINED-Pad38): J16.38
unconnected-(J16-VENDOR_DEFINED-Pad40): J16.40
unconnected-(J16-VENDOR_DEFINED-Pad42): J16.42
unconnected-(J16-{\A\L\E\R\T\}\-\P\a\d\6\2\)\: J16.62
unconnected-(J16-{\L\E\D\_\1\}\-\P\a\d\6\)\: J16.6
unconnected-(J16-{\L\E\D\_\2\}\-\P\a\d\1\6\)\: J16.16
unconnected-(J16-{\S\D\I\O\_\R\E\S\E\T\}\-\P\a\d\2\3\)\: J16.23
unconnected-(J16-{\S\D\I\O\_\W\A\K\E\}\-\P\a\d\2\1\)\: J16.21
unconnected-(J16-{\U\A\R\T\_\W\A\K\E\}\-\P\a\d\2\0\)\: J16.20
unconnected-(J18-SBU1-PadA8): J18.A8
unconnected-(J18-SBU2-PadB8): J18.B8
unconnected-(U6-CLKREQB-Pad12): U6.12
unconnected-(U14-CFG2-Pad2): U14.2
unconnected-(U14-CFG3-Pad3): U14.3
unconnected-(U14-PG-Pad10): U14.10
USB_2_P7+: A1.76 J16.3 | length 75.3
  F.Cu w0.17: J16.3@-116.77,53.01 -116.145,53.01 -116.031,53.124 -115.125,53.124 v1(-115.01,53.009) ; v1(-104.81,48.849) -104.695,48.964 -97.746,48.964 -94.46,52.25 -68.142,52.25 -62.256,46.364 -54.576,46.364 -53.301,45.089 -53.301,41.799 -53.415,41.685 A1.76@-53.415,40.96
  B.Cu w0.17: v1(-115.01,53.009) -114.895,53.124 -114.246,53.124 -113.486,52.364 -113.486,50.814 -111.636,48.964 -110.832,48.964 -110.651,48.783 -110.132,48.783 -109.951,48.964 -109.432,48.964 -109.251,48.783 -108.732,48.783 -108.551,48.964 -108.032,48.964 -107.851,48.783 -107.332,48.783 -107.151,48.964 -105.194,48.964 -104.925,48.964 v1(-104.81,48.849)
USB_2_P7-: A1.78 J16.5 | length 75.3
  F.Cu w0.17: J16.5@-116.77,53.51 -116.145,53.51 -116.031,53.396 -115.125,53.396 v1(-115.01,53.511) ; v1(-104.81,49.351) -104.695,49.236 -97.859,49.236 -94.573,52.522 -68.03,52.522 -62.144,46.636 -54.464,46.636 -53.029,45.201 -53.029,41.799 -52.915,41.685 A1.78@-52.915,40.96
  B.Cu w0.17: v1(-115.01,53.511) -114.895,53.396 -114.134,53.396 -113.214,52.476 -113.214,50.926 -111.524,49.236 -104.925,49.236 v1(-104.81,49.351)
VDC: A1.250 A1.251 A1.252 A1.253 A1.254 A1.255 A1.256 A1.257 A1.258 A1.259 A1.260 C64.2 C65.2 C67.2 C68.2 D15.1 D16.1 D17.1 D18.1 D19.1 D20.1 R53.1 TP10.1 U15.5 U16.5 | length 11.3
  F.Cu w0.2: R53.1@-11.23,44.68 -6.82,44.68 -6.44,44.3 -6.44,40.985 A1.256@-6.415,40.96
  F.Cu w1: v1@-0.68,6.54 -0.68,7.92
  B.Cu w1: TP10.1@-1,5 -0.67,5.33 v1(-0.67,6.11) v1(-0.67,6.53)
  other v1: -7.928,17.88 -7.47,17.88 -7.013,17.88 -6.555,17.88 -6.098,17.88 -5.64,17.88 -5.182,17.88 -7.928,18.34 -7.47,18.34 -7.013,18.34 -6.555,18.34 -6.098,18.34 -5.64,18.34 -5.182,18.34 -7.908,18.83 -7.45,18.83 -6.993,18.83 -6.535,18.83 -6.078,18.83 -5.62,18.83 -5.162,18.83 -7.908,19.35 -7.45,19.35 -6.993,19.35 -6.535,19.35 -6.078,19.35 -5.62,19.35 -5.162,19.35 -28.9,19.59 -28.38,19.59 -7.915,19.87 -7.458,19.87 -7,19.87 -6.543,19.87 -6.085,19.87 -5.627,19.87 -5.17,19.87 -28.39,20.05 -28.89,20.06 -26.65,20.5 -28.89,20.52 -28.39,20.52 -27.95,20.53 -27.51,20.53 -27.06,20.53 -26.23,20.52 -25.78,20.52 -28.89,20.97 -27.97,20.96 -27.54,20.96 -27.1,20.96 -26.66,20.97 -26.23,20.95 -25.82,20.96 -28.38,20.98
VPullup: D24.1 R2.2 R53.2 TP13.1 | length 34.1
  F.Cu w0.2: R2.2@-41.92,45.7 -41.2,45.7 -40.84,45.34 v1(-40.84,44.69) ; v1(-27.85,46.38) -12.96,46.38 D24.1@-12.94,46.36 ; v1(-12.95,46.98) -12.94,46.97 D24.1@-12.94,46.36 ; R53.2@-11.23,45.7 -11.89,46.36 D24.1@-12.94,46.36
  B.Cu w0.2: TP13.1@-13,48 -12.95,47.95 v1(-12.95,46.98)
  In2.Cu w0.2: v1(-40.84,44.69) -39.15,46.38 v1(-27.85,46.38)
{\C\L\K\R\E\Q\E\}\: J16.53 R32.1 | length 11.1
  F.Cu w0.2: J16.53@-116.77,65.51 v1(-115.08,65.51) ; v1(-107.08,63.87) -107.07,63.88 R32.1@-106.33,63.88
  B.Cu w0.2: v1(-115.08,65.51) -108.72,65.51 v1(-107.08,63.87)
{\C\L\K\R\E\Q\M\}\: J15.52 R27.1 | length 3.6
  F.Cu w0.2: J15.52@-108.985,40.78 -106.34,40.78 R27.1@-106.34,39.82
{\P\L\T\_\R\S\T\}\: A1.105 J2.A11 J15.50 J16.52 TP1.1 U6.19 | length 131.3
  F.Cu w0.15: U6.19@-92.335,31.49 -92.335,32.985 -92.3,33.02 v1(-91.97,33.35)
  F.Cu w0.2: v1(-111.82,64.26) -110.82,65.26 J16.52@-109.22,65.26 ; v1(-111.34,41.2) -110.42,40.28 J15.50@-108.985,40.28 ; v1(-51.22,29.49) -51.21,29.48 TP1.1@-49.86,29.48 -48.26,29.48 -46.165,31.575 A1.105@-46.165,32.76
  B.Cu w0.2: J2.A11@-133.5,43.05 -132.43,41.98 -112.12,41.98 v1(-111.34,41.2)
  In2.Cu w0.15: v1(-111.34,41.2) -107.06,36.92 -90.76,36.92 -90.67,36.83 -90.67,34.37 -91.05,33.99 -91.63,33.99 -91.97,33.65 v1(-91.97,33.35) -55.08,33.35 v1(-51.22,29.49)
  In2.Cu w0.2: v1(-111.82,64.26) -113.05,63.03 -113.05,42.91 v1(-111.34,41.2)
{\P\W\R\_\L\E\D\}\{\s\l\a\s\h\}\{PSON}: A1.5 JP1.1 R19.1 R47.1 | length 169.8
  F.Cu w0.15: R47.1@-131.72,87.78 -131.72,81.61 -125.59,75.48 -102.664,75.48 -100.394,73.21 -72.74,73.21 v1(-71.4,71.87) ; JP1.1@-76.07,16.16 -78.28,13.95 -84.98,13.95 -86.78,15.75 -86.78,22.39 -82.8,26.37 -74.68,26.37 -71.165,29.885 A1.5@-71.165,32.76 -71.165,34.155 v1(-70.5,34.82)
  F.Cu w0.2: R19.1@-58.65,16.13 -58.65,15.565 v1(-58.635,15.55)
  In2.Cu w0.15: v1(-71.4,71.87) -70.375,70.845 -70.375,34.945 v1(-70.5,34.82)
  In2.Cu w0.2: JP1.1@-76.07,16.16 -74.8,14.89 -59.295,14.89 v1(-58.635,15.55)
{\P\W\R\_\S\W\}\: A1.1 R48.2 | length 84.9
  F.Cu w0.15: R48.2@-125.39,88.44 -123.57,88.44 v1(-123.56,88.43) ; v1(-72.17,34.83) -72.165,34.825 A1.1@-72.165,32.76
  In2.Cu w0.15: v1(-123.56,88.43) -120.44,88.43 -90.15,58.14 -82.974,58.14 -72.05,47.216 -72.05,34.99 -72.17,34.87 v1(-72.17,34.83)
{\R\S\T\_\S\W\}\: A1.3 R55.2 | length 72.9
  F.Cu w0.15: A1.3@-71.665,32.76 -71.665,34.774 v1(-71.621,34.818)
  F.Cu w0.2: R55.2@-108,88.57 -107.45,88.02 -107.45,86.35 v1@-103.19,82.09
  In2.Cu w0.15: -103.18,82.11 v1(-103.18,82.09) -103.18,75.45 -86.17,58.44 -82.85,58.44 -71.621,47.211 v1(-71.621,34.818)
{\W\A\K\E\}\: A1.103 J2.B11 J15.54 J16.55 | length 131.3
  F.Cu w0.2: v1(-118.07,43.11) -118.07,57.23 -118.9,58.06 -118.9,62.51 -118.07,63.34 -118.07,65.73 -117.79,66.01 J16.55@-116.77,66.01 ; v1(-110.85,42.04) -110.09,41.28 -108.985,41.28 -108.01,41.28 -107.24,42.05 v1(-103.41,42.05) ; v1(-74.4,47.73) -74.39,47.74 -66.99,47.74 -62.25,43 -62.25,42.96 -61.85,42.56 v1(-59.8,42.56) ; v1(-46.67,34.57) -46.665,34.565 A1.103@-46.665,32.76
  B.Cu w0.2: J2.B11@-136,43.05 -135.04,44.01 -133.28,44.01 -132.38,43.11 v1(-118.07,43.11) -111.92,43.11 v1(-110.85,42.04)
  In2.Cu w0.2: v1(-103.41,42.05) -103.26,42.2 -103.26,46.29 -102.68,46.87 -75.26,46.87 v1(-74.4,47.73) ; v1(-59.8,42.56) -58.62,41.38 -49.77,41.38 -45.3,36.91 -45.3,35.94 v1(-46.67,34.57)
pads on no net: A1.Un1 A1.Un2 BT1.Un1 BT1.Un2 FID1.Un1 FID2.Un1 J2.Un1 J2.Un2 J6.Un1 J6.Un2 J15.Un1 J15.Un2 J16.Un1 J16.Un2 J17.Un1 J18.Un1 J18.Un2 U6.Un1 U6.Un2 U6.Un3 U6.Un4